# Altium PCB my_ROBOT.PcbDoc
Units mil, origin at the board's own origin, x right, y up, seen from the top; angles counter-clockwise.
Board outline 3790.92 x 4990.98 mil, 2 copper layers (Top Layer, Bottom Layer); 77 components, 81 nets, 300 pads, 118 vias.
Unrouted connection lines stored in the file: 2.
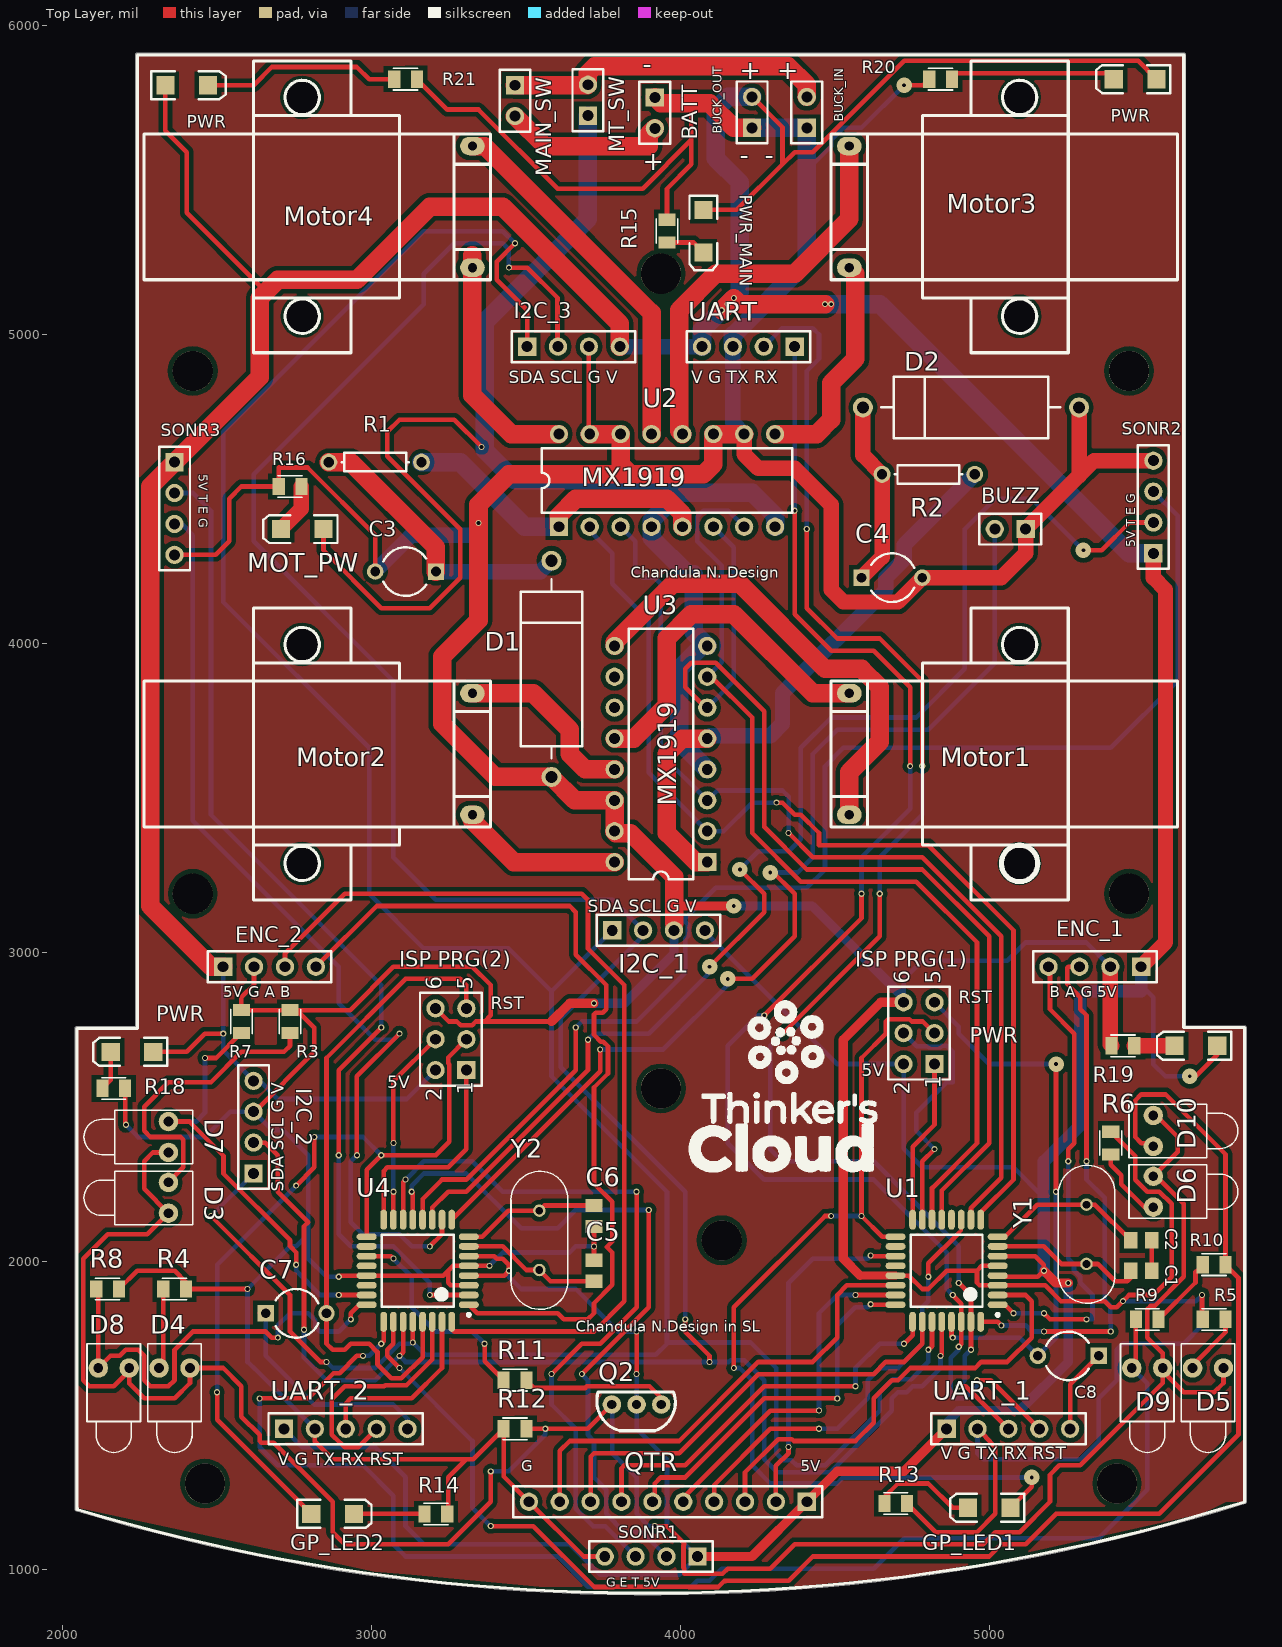
[diagram p0: Top Layer view]
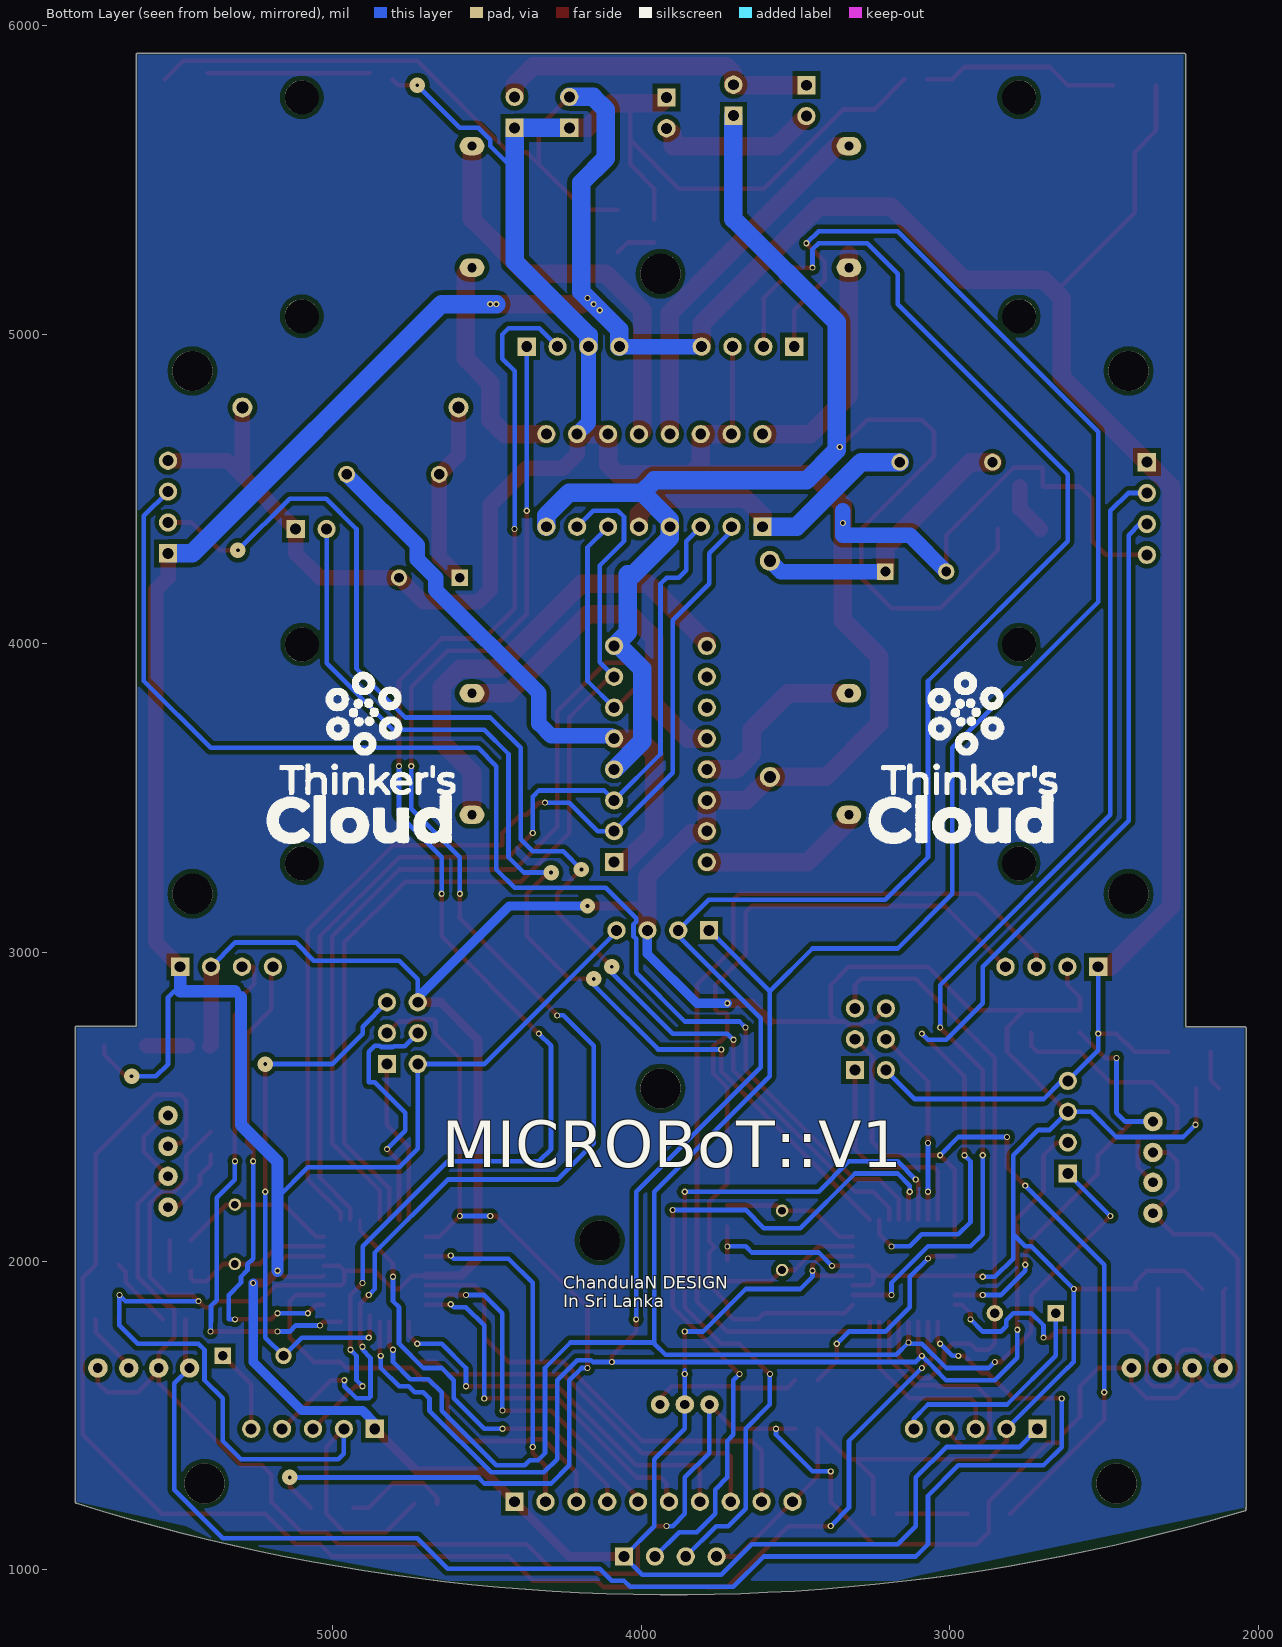
[diagram p1: Bottom Layer view, seen from below]

## Layer stack, top to bottom
Top Solder: solder mask 0.4, Solder Resist, Dk 3.5
Top Layer: signal copper 1.4
Dielectric 1: dielectric 12.6, FR-4, Dk 4.8
Bottom Layer: signal copper 1.4
Bottom Solder: solder mask 0.4, Solder Resist, Dk 3.5

## Board outline
2041.83,1199.19 cw(c2045.88,1202.15) 2040.87,1202.15 2040.87,2753.42 cw(c2045.88,2753.42) 2045.88,2758.43 2236.59,2758.43 2236.59,5905.51 cw(c2241.61,5905.51) 2241.61,5910.53 5629.92,5910.53 cw(c5629.92,5905.51) 5634.94,5905.51 5634.94,2760.92 5826.77,2760.92 cw(c5826.77,2755.91) 5831.79,2755.91 5831.79,1220.47 cw(c5826.77,1220.47) 5828.27,1215.69 cw(c3896.84,7363.24) 2044.43,1191.41 cw(c2045.87,1196.22)

## Design rules (kind name [scope] priority, off if disabled: settings)
Clearance [All] p1: gap=8 except(15: Track-Poly SMDPad-Poly THPad-Poly Via-Poly Poly-Poly)
PolygonConnect [All] p1: connectstyle=Relief reliefconductorwidth=10 reliefentries=4 polygonreliefangle="90 Angle" airgapwidth=10
RoutingVias [All] p1: holewidth=28 width=50 viastyle="Through Hole" minholewidth=28 minwidth=50 maxholewidth=28 maxwidth=50
SolderMaskExpansion [All] p1: expansion=4
Width [All] p1: maxlimit=80 minlimit=10 preferedwidth=15
30 further rules are at their usual default settings.

## Classes and differential pairs
component class MCU_2: C5 C6 C7 D3 D4 D5 D6 D7 D8 D9 D10 D12 P13 P14 P15 P16 P17 P18 P19 Q2 R3 R4 R5 R6 R7 R8 R9 R10 R11 R12 R14 U4 Y2
component class Motor_control: C3 C4 D1 D2 MOT_PW Motor1 Motor2 Motor3 Motor4 PWR R1 R2 R16 R18 R19 R20 R21 U2 U3
component class My_robot_1: BATT BUCK_IN BUCK_OUT C1 C2 C8 ENC_1 GP_LED1 I2C_1 I2C_2 I2C_3 MAIN_SW MT_SW PWR_MAIN QTR R13 R15 U1 UART UART_1 Y1

## Components (designator, comment, footprint, x,y, rotation, side; value= is the part's Value field where it differs from the comment)
BATT "Battery" HDR1X2 3917.32,5767.72 r270 top (schematic designator P20)
BUCK_IN "Buck_In" HDR1X2 4409.45,5669.29 r90 top (schematic designator P23)
BUCK_OUT "Buck_out" HDR1X2 4232.28,5669.29 r90 top (schematic designator P24)
BUZZ "Buzzer" HDR1X2 5118.11,4370.08 r180 top (schematic designator P19)
C1 "Cap_0805" CAP_0805 5492.13,1968.5 r0 top
C2 "Cap_0805" CAP_0805 5492.13,2066.93 r0 top
C3 "Cap2" CAPR5-4X5 3110.24,4232.28 r180 top
C4 "Cap2" CAPR5-4X5 4685.04,4212.6 r0 top
C5 "Cap_0805" CAP_0805 3720.47,1968.5 r90 top
C6 "Cap_0805" CAP_0805 3720.47,2145.67 r270 top
C7 "Cap2" CAPR5-4X5 2755.91,1830.71 r0 top
C8 "Cap2" CAPR5-4X5 5255.91,1692.91 r180 top
D1 "D Zener" DIODE-0.7 3582.68,3917.32 r90 top
D2 "D Zener" DIODE-0.7 4940.94,4763.78 r180 top
D3 "LED0" LED-1 2342.52,2204.72 r180 top
D4 "LED0" LED-1 2362.2,1653.54 r270 top
D5 "LED0" LED-1 5708.66,1653.54 r270 top
D6 "LED0" LED-1 5531.5,2224.41 r0 top
D7 "LED0" LED-1 2342.52,2401.57 r180 top
D8 "LED0" LED-1 2165.35,1653.54 r270 top
D9 "LED0" LED-1 5511.81,1653.54 r270 top
D10 "LED0" LED-1 5531.5,2421.26 r0 top
ENC_1 "Interrupt_1" HDR1X4 5492.13,2952.76 r180 top (schematic designator P12)
ENC_2 "Interrupt_2" HDR1X4 2519.68,2952.76 r0 top (schematic designator P13)
GP_LED1 "LED2" 3.2X1.6X1.1 5000,1200.79 r180 top (schematic designator D11)
GP_LED2 "LED2" 3.2X1.6X1.1 2874.02,1181.1 r0 top (schematic designator D12)
I2C_1 "DISPLAY" HDR1X4 3779.53,3070.87 r0 top (schematic designator P8)
I2C_2 "I2C_2" HDR1X4 2618.11,2283.46 r90 top (schematic designator P7)
I2C_3 "I2C_1" HDR1X4 3503.94,4960.63 r0 top (schematic designator P9)
"ISP PRG(1)" "ISP_Prgm" HDR2X3 4822.83,2637.8 r90 top (schematic designator P11)
"ISP PRG(2)" "ISP_Prgm2" HDR2X3 3307.09,2618.11 r90 top (schematic designator P15)
MAIN_SW "Main_SW" HDR1X2 3464.57,5807.09 r270 top (schematic designator P21)
MOT_PW "MOTOR" 3.2X1.6X1.1 2775.59,4370.08 r180 top (schematic designator D14)
Motor1 "MotorRF" Micro_Metal_Motor 5610.24,3405.51 r180 top (schematic designator P3)
Motor2 "MotorRR" Micro_Metal_Motor 2263.78,3877.95 r0 top (schematic designator P5)
Motor3 "MotorLF" Micro_Metal_Motor 5610.24,5177.17 r180 top (schematic designator P2)
Motor4 "MotorLR" Micro_Metal_Motor 2263.78,5649.61 r0 top (schematic designator P4)
MT_SW "Motor_Sw" HDR1X2 3700.79,5708.66 r90 top (schematic designator P22)
PWR "PWR" 3.2X1.6X1.1 2224.41,2677.17 r180 top (schematic designator D15)
PWR "PWR" 3.2X1.6X1.1 5669.29,2696.85 r180 top (schematic designator D16)
PWR "PWR" 3.2X1.6X1.1 5472.44,5826.77 r180 top (schematic designator D17)
PWR "PWR" 3.2X1.6X1.1 2401.57,5807.09 r0 top (schematic designator D18)
PWR_MAIN "PWR" 3.2X1.6X1.1 4074.8,5334.65 r270 top (schematic designator D13)
Q2 "NPN" NPN-d400 3858.27,1535.43 r90 top
QTR "QTR" HDR1X10 4409.45,1220.47 r180 top (schematic designator P1)
R1 "Res1" AXIAL-0.3 3011.81,4586.61 r0 top
R2 "Res1" AXIAL-0.3 4803.15,4547.24 r0 top
R3 "Res_0805" Res_0805 2736.22,2775.59 r270 top
R4 "Res_0805" Res_0805 2362.2,1909.45 r180 top
R5 "Res_0805" Res_0805 5728.35,1811.02 r0 top
R6 "Res_0805" Res_0805 5393.7,2381.89 r270 top
R7 "Res_0805" Res_0805 2578.74,2775.59 r270 top
R8 "Res_0805" Res_0805 2145.67,1909.45 r180 top
R9 "Res_0805" Res_0805 5511.81,1811.02 r180 top
R10 "Res_0805" Res_0805 5728.35,1988.19 r0 top
R11 "Res_0805" Res_0805 3464.57,1614.17 r0 top
R12 "Res_0805" Res_0805 3464.57,1456.69 r180 top
R13 "Res_0805" Res_0805 4697.6,1214.61 r0 top
R14 "Res_0805" Res_0805 3208.66,1181.1 r0 top
R15 "Res_0805" Res_0805 3956.69,5334.65 r270 top
R16 "Res_0805" Res_0805 2736.22,4507.87 r0 top
R18 "Res_0805" Res_0805 2165.35,2559.06 r180 top
R19 "Res_0805" Res_0805 5433.07,2696.85 r0 top
R20 "Res_0805" Res_0805 4842.52,5826.77 r0 top
R21 "Res_0805" Res_0805 3110.24,5826.77 r180 top
SONR1 "SONAR3" HDR1X4 4055.12,1043.31 r180 top (schematic designator P18)
SONR2 "SONAR2" HDR1X4 5531.5,4291.34 r90 top (schematic designator P17)
SONR3 "SONAR1" HDR1X4 2362.2,4586.61 r270 top (schematic designator P16)
U1 "ATmega328P-AU" 32A_N 4862.2,1968.5 r180 top
U2 "LM246N_1" DIP16 3956.69,4527.56 r0 top
U3 "LM246N_2" DIP16 3937.01,3641.73 r90 top
U4 "ATmega328P-AU" 32A_N 3149.61,1968.5 r180 top
UART "UART" HDR1X4 4370.08,4960.63 r180 top (schematic designator P6)
UART_1 "FTDI_Prgm" HDR1X5 4862.2,1456.69 r0 top (schematic designator P10)
UART_2 "FTDI_Prgm2" HDR1X5 2716.54,1456.69 r0 top (schematic designator P14)
Y1 "16MHz" XTAL_THT 5314.96,2086.61 r90 top
Y2 "16MHz" XTAL_THT 3543.31,2066.93 r90 top

## Footprints (in the part's own frame and the unit in brackets; to place one, negate y for a bottom-side part, rotate by r counter-clockwise, add the part's x,y. Pads: shape width x height; smd on the part's side, far side on the other; paste and mask are expansions set on the pad)
3.2X1.6X1.1 [mm] "SMT LED; 2 Flat Leads"
  rect 1.5x1.5 smd: 1(-1.75,0) 2(1.75,0)
  silkscreen extent -2.9,-1.15 3.2,1.15
32A_N [mm] "Thin QFP, 32-Leads, Body 7x7mm, Pitch 0.8mm, IPC Medium Density"
  oval 1.65x0.55 smd: 1(-4.2,2.8) 2(-4.2,2) 3(-4.2,1.2) 4(-4.2,0.4) 5(-4.2,-0.4) 6(-4.2,-1.2) 7(-4.2,-2) 8(-4.2,-2.8) 17(4.2,-2.8) 18(4.2,-2) 19(4.2,-1.2) 20(4.2,-0.4) 21(4.2,0.4) 22(4.2,1.2) 23(4.2,2) 24(4.2,2.8)
  oval 0.55x1.65 smd: 9(-2.8,-4.2) 10(-2,-4.2) 11(-1.2,-4.2) 12(-0.4,-4.2) 13(0.4,-4.2) 14(1.2,-4.2) 15(2,-4.2) 16(2.8,-4.2) 25(2.8,4.2) 26(2,4.2) 27(1.2,4.2) 28(0.4,4.2) 29(-0.4,4.2) 30(-1.2,4.2) 31(-2,4.2) 32(-2.8,4.2)
  silkscreen extent -4.33,-2.95 2.95,3.75, body extent -3.5,-3.5 3.5,3.5, height 1.2
AXIAL-0.3 [mm] "Axial Device, Thru-Hole; 2 Leads; 0.3 in Pin Spacing"
  round 1.4 hole 0.85: 1(-3.81,0) 2(3.81,0)
  silkscreen extent -2.77,-0.76 2.77,0.76
CAP_0805 [mm]
  rect 1.1x1.38 smd: 1(-0.863,0) 2(0.863,0)
  body extent -1,-0.66 1,0.65, height 0.79
CAPR5-4X5 [mm] "Capacitor; 2 Leads"
  rect 1.35x1.35 hole 0.8: 1(-2.5,0)
  round 1.35 hole 0.8: 2(2.5,0)
  silkscreen extent -1.69,-2 1.82,2
DIODE-0.7 [mm] "Diode, Thru-Hole; 2 Leads; 0.7 in Pin Spacing"
  round 1.65 hole 1: 1(-8.89,0) 2(8.89,0)
  silkscreen extent -7.37,-2.54 7.37,2.54
DIP16 [mm] "DIP; 16 Leads; Row Spacing 7.62 mm; Pitch 2.54 mm"
  rect 1.5x1.5 hole 0.9: 1(-8.89,-3.81)
  round 1.5 hole 0.9: 2(-6.35,-3.81) 3(-3.81,-3.81) 4(-1.27,-3.81) 5(1.27,-3.81) 6(3.81,-3.81) 7(6.35,-3.81) 8(8.89,-3.81) 9(8.89,3.81) 10(6.35,3.81) 11(3.81,3.81) 12(1.27,3.81) 13(-1.27,3.81) 14(-3.81,3.81) 15(-6.35,3.81) 16(-8.89,3.81)
  silkscreen extent -10.3,-2.65 10.3,2.65
HDR1X2 [mm] "Connector; Header; 2 Position"
  rect 1.5x1.5 hole 0.9: 1(0,0)
  round 1.5 hole 0.9: 2(2.54,0)
  silkscreen extent -1.27,-1.27 3.81,1.27
HDR1X4 [mm] "Connector; Header; 4 Position"
  rect 1.5x1.5 hole 0.9: 1(0,0)
  round 1.5 hole 0.9: 2(2.54,0) 3(5.08,0) 4(7.62,0)
  silkscreen extent -1.27,-1.27 8.89,1.27
HDR1X5 [mm] "Connector; Header; 5 Position"
  rect 1.5x1.5 hole 0.9: 1(0,0)
  round 1.5 hole 0.9: 2(2.54,0) 3(5.08,0) 4(7.62,0) 5(10.16,0)
  silkscreen extent -1.27,-1.27 11.43,1.27
HDR1X10 [mm] "Connector; Header; 10 Position"
  rect 1.5x1.5 hole 0.9: 1(0,0)
  round 1.5 hole 0.9: 2(2.54,0) 3(5.08,0) 4(7.62,0) 5(10.16,0) 6(12.7,0) 7(15.24,0) 8(17.78,0) 9(20.32,0) 10(22.86,0)
  silkscreen extent -1.27,-1.27 24.13,1.27
HDR2X3 [mm] "Connector; Header; 3x2 Position"
  rect 1.5x1.5 hole 0.9: 1(0,0)
  round 1.5 hole 0.9: 2(0,2.54) 3(2.54,0) 4(2.54,2.54) 5(5.08,0) 6(5.08,2.54)
  silkscreen extent -1.27,-1.27 6.35,3.81
LED-1 [mm] "LED; 2 Leads"
  round 1.6 hole 0.8: 1(0,1.27) 2(0,-1.27)
  silkscreen extent -2,-2.2 6.95,2.2
Micro_Metal_Motor [mil]
  oval 80x60 hole 30: 1(1062.99,-433.07) 2(1062.99,-39.37)
  silkscreen extent 0,-709 1122,236
NPN-d400 [mil]
  round 60 hole 30: 1(0,0) 2(0,-80) 3(0,80)
  silkscreen extent -85,-126 40,129
Res_0805 [mm]
  rect 1x1.42 smd: 1(-0.935,0) 2(0.935,0)
  silkscreen extent -1,-0.89 1,0.89, body extent -1,-0.63 1,0.63, height 0.54
XTAL_THT [mm]
  round 1.03 hole 0.63: 1(-2.44,0) 2(2.44,0)
  silkscreen extent -5.68,-2.33 5.68,2.33

## Part data
BATT BUCK_IN BUCK_OUT BUZZ MAIN_SW Motor1 Motor2 Motor3 Motor4 MT_SW: library part "Header 2", "Header, 2-Pin"
C1 C2 C5 C6: "Cap Ceramic 10uF 10V X5R 10% SMD 0805 85°C Embossed Plastic T/R"
C3 C4 C7 C8: "Capacitor"
D1 D2: "Zener Diode"
D3 D4 D5 D6 D7 D8 D9 D10: "Typical INFRARED GaAs LED"
ENC_1 ENC_2 I2C_1 I2C_2 I2C_3 SONR1 SONR2 SONR3 UART: library part "Header 4", "Header, 4-Pin"
GP_LED1 GP_LED2: "Typical RED, GREEN, YELLOW, AMBER GaAs LED"
"ISP PRG(1)" "ISP PRG(2)": library part "Header 3X2", "Header, 3-Pin, Dual row"
MOT_PW PWR PWR PWR PWR PWR_MAIN: library part LED2, "Typical RED, GREEN, YELLOW, AMBER GaAs LED"
Q2: library part Component_1, "NPN- d400"
QTR: library part "Header 10", "Header, 10-Pin"
R1 R2: "Resistor"
R3 R4 R5 R6 R7 R8 R9 R10 R11 R12 R13 R14 R15 R16 R18 R19 R20 R21: "Res Thick Film 0805 392 Ohm 1% 1/3W ±100ppm/°C Molded SMD SMD T/R"
U1 U4: "8-bit AVR Microcontroller, 32KB Flash, 1KB EEPROM, 2KB SRAM, 32-pin TQFP, Industrial Grade (-40°C to 85°C)"
U2 U3: library part LM246N, "Programmable Quad Bipolar Operational Amplifier"
UART_1 UART_2: library part "Header 5", "Header, 5-Pin"
Y1 Y2: library part Xtal_THT, "Crystal 3.93216MHz 17pF 2-Pin HC-49/U"

## Free pads (board coordinates)
  round 110 hole 110: 3(2775.59,5767.72) 5(5098.43,5059.06) 6(5098.43,5767.72) 7(5098.43,3996.06) 8(2775.59,5059.06) 9(5098.43,3287.4) 10(2775.59,3287.4) 12(2775.59,3996.06)
  round 130 hole 130: 13(2421.26,4881.89) 14(5452.76,4881.89) 15(2421.26,3188.98) 16(5452.76,3188.98) 17(2460.63,1279.53) 18(5413.39,1279.53) 19(3937.01,2559.06) 20(4133.86,2066.93) 21(3937.01,5196.85)

## Via types
v1: diameter 20, hole 12, Top Layer to Bottom Layer, 107 vias
v2: diameter 50, hole 12, Top Layer to Bottom Layer, 10 vias
v3: diameter 20, hole 12, Top Layer to Bottom Layer, tented bottom, 1 vias

## Nets (pads, with @x,y where several pads share a name; then routed paths per layer and width w, separated by ;. In a path a pad name is that pad's centre, name@x,y a point inside that pad or via, vN(x,y) a via of type N, cw(c..) or ccw(c..) an arc to the next point about the centre after c; other vN are vias at no path point)
GND: "ISP PRG(1).6" "ISP PRG(2).6" BATT.1 BUCK_IN.1 BUCK_OUT.1 BUZZ.1 C3.2 C4.2 C5.2 C6.2 D1.1 D2.1 ENC_1.2 ENC_2.2 I2C_1.3 I2C_2.3 I2C_3.3 QTR.10 R3.1 R4.1 R5.1 R6.1 R7.1 R8.1 R12.2 R13.2 R14.2 R15.1 R16.1 R18.1 R19.1 R20.1 R21.1 SONR1.4 SONR2.4 SONR3.4 U1.3 U1.5 U1.21 U2.10 U2.11 U2.14 U2.15 U3.10 U3.11 U3.14 U3.15 U4.3 U4.5 U4.21 UART.3 UART_1.2 UART_2.2 | length 25905.2
  Top Layer w10: 3399.61,2775.59 3457.87,2775.59
  Top Layer w15: R8.1 2241.54,1968.5 2362.2,1968.5 2399.02,1931.69 R4.1 v1(2598.43,1909.45) ; v1@2202.17,2443.5 R18.1 ; SONR3.4 2495.28,4286.61 2539.37,4330.71 2539.37,4468.5 2578.74,4507.87 R16.1 2699.41,4569.49 2792.72,4569.49 3011.81,4350.39 C3.2 ; I2C_2.3 2621.26,2483.47 2814.96,2677.17 2814.96,2755.91 R3.1@2758.46,2812.4 ; ENC_2.2 2619.68,2895.27 2578.74,2854.33 R7.1 R3.1 R3.1@2758.46,2812.4 ; UART_2.2 2816.54,1415.75 2874.02,1358.27 3307.09,1358.27 ; v3(2893.7,1948.82) 2897.64,1952.75 U4.21 3232.28,1952.75 3248.03,1968.5 ; R21.1 3245.47,5728.35 3346.46,5728.35 3602.36,5472.44 3877.95,5472.44 4035.43,5629.92 4035.43,5748.03 4035.43,5551.18 3956.69,5472.44 R15.1 ; 3207.09,2818.11 3249.61,2775.59 3275.98,2775.59 3288.43,2763.14 3325.74,2763.14 3338.19,2775.59 3582.68,2775.59 ; R14.2 3248.03,1181.1 3248.03,1299.21 3307.09,1358.27 ; U4.3 3255.91,1921.26 3248.03,1929.13 3248.03,1968.5 ; 3366.14,2775.59 3385.83,2795.28 3385.83,2893.7 3326.77,2952.76 3070.87,2952.76 2930.51,2812.4 R3.1@2758.46,2812.4 ; v1(3381.89,1984.25) U4.5 3263.78,1984.25 3248.03,1968.5 ; I2C_3.3 3703.94,4680.31 U2.15 ; C5.2 C6.2 ; SONR1.4 3686.61,1043.31 QTR.10 3427.76,1302.16 R12.2 3329.33,1358.27 3307.09,1358.27 ; I2C_1.3 3979.53,3133.07 ; U1.21 4740.16,1952.75 4783.46,1909.45 4803.15,1909.45 4862.2,1968.5 4960.63,1968.5 ; v2(4724.41,5807.09) 4786.02,5807.09 R20.1 ; R13.2 4826.97,1122.05 4960.63,1122.05 5019.69,1181.1 5019.69,1397.64 4988.28,1429.04 4988.28,1430.61 UART_1.2 ; U1.5 4976.38,1984.25 4960.63,1968.5 ; R6.1 5472.44,2339.96 5472.44,2263.78 5511.81,2224.41 5551.18,2224.41 5590.55,2185.04 5590.55,1948.82 5531.5,1889.76 5452.76,1889.76 v1(5433.07,1870.08) 5413.39,1850.39 5393.7,1850.39 5374.02,1870.08 5232.46,1870.08 5181.28,1921.26 U1.3 4968.51,1921.26 4960.63,1929.13 4960.63,1968.5 ; v1(5688.98,1889.76) 5688.98,1813.58 R5.1
  Top Layer w25: 4582.68,1952.75 U1.21
  Top Layer w30: 3582.68,2775.59 3641.73,2834.65 v1(3720.47,2834.65) ; 3979.53,3133.07 3996.06,3149.61 v2(4173.23,3149.61) ; 4582.68,1952.75 4527.56,2007.87 4527.56,2716.54 4648.82,2837.8 4722.83,2837.8
  Top Layer w50: U2.10 4206.69,4612.21 4251.97,4566.93 4370.08,4566.93 4488.19,4448.82 4488.19,4173.68 4528.01,4133.86 4704.72,4133.86 C4.2 5039.37,4212.6 5118.11,4291.34 BUZZ.1 5290.94,4542.91 ; D2.1 5290.94,4542.91 ; ENC_1.2 5392.13,2700.98 R19.1 ; SONR2.4 5339.37,4591.34 5290.94,4542.91
  Top Layer w60: U2.15 U2.14 3806.69,4579.13 3838.58,4547.24 ; BATT.1 3937.01,5748.03 4035.43,5748.03 4094.49,5748.03 4173.23,5669.29 BUCK_OUT.1 ; I2C_1.3@3979.53,3093.7 3979.53,3244.88 3838.58,3385.83 3791.34,3385.83 3785.43,3391.73 U3.15 U3.14 3658.27,3491.73 D1.1 3401.18,3567.32 3228.35,3740.16 3228.35,3956.69 3346.46,4074.8 3346.46,4448.82 3444.88,4547.24 3838.58,4547.24 ; U2.10 U2.11 4106.69,4579.13 4074.8,4547.24 3838.58,4547.24
  Bottom Layer w15: v1(2204.72,2440.94) 2244.09,2401.57 2460.63,2401.57 2542.52,2483.47 I2C_2.3 2677.17,2424.41 2713.39,2424.41 2795.28,2342.52 2795.28,2086.61 ; UART_2.2 2618.11,1655.12 2618.11,1653.54 2598.43,1673.23 v1(2598.43,1909.45) 2736.22,2047.24 2755.91,2047.24 2795.28,2086.61 ; v3(2893.7,1948.82) 2854.33,1948.82 2795.28,2007.87 2795.28,2086.61 ; v1(3381.89,1984.25) 3425.2,2027.56 3641.73,2027.56 3661.42,2047.24 v1(3720.47,2047.24) ; 4409.45,5531.5 4488.19,5610.24 4488.19,5629.92 4527.56,5669.29 4586.61,5669.29 v2(4724.41,5807.09) ; 4722.83,2837.8 4722.83,2853.38 4722.83,2911.81 4783.46,2972.44 5059.06,2972.44 5118.11,3031.5 5313.39,3031.5 ENC_1.2 ; UART_1.2 4962.2,1376.38 4980.31,1358.27 5295.28,1358.27 5354.33,1417.32 5354.33,1555.12 5413.39,1614.17 5413.39,1712.6 5433.07,1732.28 5629.92,1732.28 5688.98,1791.34 v1(5688.98,1889.76) 5669.29,1870.08 v1(5433.07,1870.08)
  Bottom Layer w30: v1(3720.47,2834.65) 3818.9,2834.65 3979.53,2995.28 I2C_1.3 ; v2(4173.23,3149.61) 4426.61,3149.61 4722.83,2853.38
  Bottom Layer w50: C3.2 3129.92,4350.39 3346.46,4350.39 3346.46,4429.13 ; UART.3 4170.08,4714.17 U2.10
  Bottom Layer w60: UART.3 4170.08,4996.85 4409.45,5236.22 4409.45,5531.5 BUCK_IN.1 BUCK_OUT.1
  other v1: 3346.46,4389.76
NetC1_1: C1.1 U1.7 Y1.1 | length 504.9
  Top Layer w15: U1.7 5177.16,2047.24 5233.86,1990.55 Y1.1 5351.97,1990.55 5407.99,1934.53 5447.36,1934.53 5458.15,1945.32 C1.1
NetC1_2: C1.2 C2.2 | length 98.4
  Top Layer w15: C1.2 C2.2
NetC2_1: C2.1 U1.8 Y1.2 | length 521.6
  Top Layer w15: U1.8 5051.18,2078.74 5155.12,2182.68 Y1.2 5342.4,2182.68 C2.1
NetC3_1: C3.1 D1.2 R1.1 | length 928.3
  Top Layer w60: R1.1 2933.07,4586.61 3208.66,4311.02 C3.1
  Bottom Layer w50: C3.1 3547.64,4232.28 D1.2
NetC4_1: C4.1 D2.2 R2.1 | length 604.5
  Top Layer w50: C4.1 4653.15,4279.13 R2.1 4590.94,4609.45 D2.2
NetC5_1: C5.1 U4.7 Y2.1 | length 452.2
  Top Layer w15: U4.7 3425.2,2047.24 3501.58,1970.87 Y2.1 3579.65,1934.53 C5.1
NetC6_1: C6.1 U4.8 Y2.2 | length 447.3
  Top Layer w15: U4.8 3358.27,2078.74 3442.52,2162.99 Y2.2 3559.96,2179.65 C6.1
NetC7_1: C7.1 UART_2.5 | length 733.8
  Top Layer w15: C7.1@2637.79,1830.71 C7.1
  Bottom Layer w15: C7.1 2657.48,1692.91 2814.96,1535.43 3070.87,1535.43 3116.54,1489.76 UART_2.5
NetC7_2: "ISP PRG(2).5" C7.2 U4.29 | length 2106.9
  Top Layer w15: U4.29 3165.35,1688.98 3096.87,1620.49 3064.55,1620.49 3019.19,1665.85 3019.19,1705.22 2992.13,1732.28 2933.07,1732.28 2913.39,1712.6 2874.02,1712.6 2854.33,1732.28 2854.33,1771.65 C7.2 2854.33,2657.48 3110.24,2913.39 3287.4,2913.39 3307.09,2893.7 3307.09,2818.11
NetC8_1: C8.1 UART_1.5 | length 274.4
  Top Layer w15: UART_1.5 5262.2,1600.79 C8.1
NetC8_2: "ISP PRG(1).5" C8.2 U1.29 | length 1826.2
  Top Layer w15: v1@4877.95,1755.9 U1.29 U1.29@4877.95,1822.83 ; v1(5216.54,2224.41) v2(5216.54,2637.8)
  Bottom Layer w15: 4822.83,2837.8 4901.57,2759.06 4901.57,2736.22 5000,2637.8 v2(5216.54,2637.8) ; v1(4881.89,1751.97) 5098.43,1751.97 C8.2 5216.54,1751.97 v1(5216.54,2224.41)
NetD3_1: D3.1 D4.1 D5.1 D6.1 D7.1 D8.1 D9.1 D10.1 Q2.3 R12.1 | length 7467.7
  Top Layer w15: D8.1 D8.1@2215.35,1644.49 ; D7.1 2292.52,2351.57 2263.78,2322.83 2263.78,2233.46 D3.1 2274.41,2086.61 2145.67,2086.61 2066.93,2007.87 2066.93,1614.17 2086.61,1594.49 2165.35,1594.49 D8.1@2215.35,1644.49 ; v1(3385.83,1318.9) 3385.83,1220.47 3248.03,1082.68 2913.39,1082.68 2874.02,1122.05 2874.02,1220.47 2682.82,1411.66 2643.45,1411.66 2637.8,1417.32 2637.8,1437.01 2578.74,1496.06 2578.74,1594.49 2519.68,1653.54 D4.1 2412.2,1605.12 2362.2,1555.12 2263.78,1555.12 2215.35,1603.54 D8.1@2215.35,1644.49 ; R12.1 3699.53,1456.69 Q2.3 ; v1(3917.32,1141.73) 3956.69,1141.73 4013.09,1085.33 4013.09,1082.26 4010.09,1079.26 4010.09,1007.36 4013.09,1004.36 4013.09,986.91 4136.52,986.91 4153.54,1003.94 4291.34,1003.94 4370.08,1082.68 4980.31,1082.68 5019.69,1122.05 5098.43,1122.05 5196.85,1220.47 5196.85,1308.27 5227.16,1338.58 5295.28,1338.58 5561.81,1605.12 D9.1@5561.81,1642.91 ; D10.1 5540.55,2471.26 5610.24,2401.57 5610.24,2353.15 D6.1 5540.55,2274.41 5629.92,2185.04 5629.92,1948.82 5535.58,1854.48 5522.52,1854.48 5511.81,1843.77 5511.81,1751.97 5561.81,1701.97 D9.1 D9.1@5561.81,1642.91 ; D5.1 5758.66,1605.12 5728.35,1574.8 5629.92,1574.8 D9.1@5561.81,1642.91
  Bottom Layer w15: v1(3385.83,1318.9) 3444.88,1318.9 3562.99,1437.01 v1(3562.99,1456.69) ; Q2.3 3779.53,1534.17 3779.53,1377.95 3858.27,1299.21 3858.27,1181.1 3897.64,1141.73 v1(3917.32,1141.73)
NetD3_2: D3.2 R3.2 | length 971.6
  Top Layer w15: D3.2 2390.94,2303.15 2390.94,2392.52 2381.89,2401.57 2283.46,2401.57 2263.78,2421.26 2263.78,2500 2342.52,2578.74 2480.32,2578.74 2578.74,2677.17 2716.54,2677.17 2736.22,2696.85 R3.2
NetD4_2: D4.2 R4.2 | length 261.4
  Top Layer w15: D4.2 2325.39,1666.73 R4.2
NetD5_2: D5.2 R5.2 | length 201.6
  Top Layer w15: D5.2 5658.66,1662.6 5765.16,1769.09 R5.2
NetD6_2: D6.2 R6.2 | length 244.6
  Top Layer w15: R6.2 5393.7,2312.21 5428.15,2277.76 5428.15,2249.02 5502.76,2174.41 D6.2
NetD7_2: D7.2 R7.2 U4.23 | length 1414.1
  Top Layer w15: D7.2 2410.63,2451.57 2520.77,2341.44 2520.77,2282.38 2736.22,2066.93 2736.22,2047.24 2755.91,2027.56 v1(2755.91,1988.19) ; v1(2460.63,2657.48) 2497.44,2657.48 R7.2 ; v1(2893.7,1889.76) U4.23
  Bottom Layer w15: D7.2 2431.89,2451.57 2460.63,2480.32 v1(2460.63,2657.48) ; v1(2755.91,1988.19) 2755.91,1968.5 2834.65,1889.76 v1(2893.7,1889.76)
NetD8_2: D8.2 R8.2 U4.24 | length 1525.3
  Top Layer w15: R8.2 2115.35,1902.95 D8.2 2154.72,1692.91 2185.04,1692.91 2204.72,1712.6 2244.09,1712.6 2263.78,1692.91 2263.78,1614.17 2283.46,1594.49 2342.52,1594.49 2362.2,1614.17 2362.2,1712.6 2421.26,1771.65 2657.48,1771.65 2677.17,1751.97 v1(2696.85,1751.97) ; v1(2933.07,1811.02) 2933.07,1830.71 2960.63,1858.27 U4.24
  Bottom Layer w15: v1(2696.85,1751.97) 2696.85,1791.34 2736.22,1830.71 2795.28,1830.71 2817.78,1808.21 2817.78,1788.52 2834.65,1771.65 2893.7,1771.65 v1(2933.07,1811.02)
NetD9_2: D9.2 R9.2 U4.25 | length 4560.3
  Top Layer w15: v1(2637.8,1555.12) 2795.28,1555.12 2876.83,1636.67 2896.52,1636.67 2952.76,1692.91 v1(2972.44,1692.91) ; v1(3031.5,1732.28) 3039.37,1740.16 U4.25 ; D9.2 5475,1666.73 R9.2
  Bottom Layer w15: v1(2637.8,1555.12) 2637.8,1397.64 2696.85,1338.58 2972.44,1338.58 3070.87,1240.16 3070.87,1082.68 3110.24,1043.31 3602.36,1043.31 3700.79,944.88 4035.43,944.88 4055.12,964.57 4094.49,964.57 4133.86,1003.94 4625.98,1003.94 4724.41,1102.36 5354.33,1102.36 5511.81,1259.84 5511.81,1603.54 D9.2 ; v1(2972.44,1692.91) 2992.13,1692.91 v1(3031.5,1732.28)
NetD10_2: D10.2 R10.2 U4.26 | length 5011.4
  Top Layer w15: U4.26 3070.87,1732.28 3051.18,1712.6 3051.18,1692.91 v1@3090.24,1653.86 ; v1(3385.83,1141.73) 3523.62,1141.73 3720.79,944.57 3784.66,944.57 3784.98,944.88 4026.83,944.88 4027.15,944.57 4122.46,944.57 4141.8,963.91 4146.04,963.91 4146.7,964.57 4350.39,964.57 4429.13,1043.31 5000,1043.31 5039.37,1082.68 5118.11,1082.68 5216.54,1181.1 5551.18,1181.1 5807.09,1437.01 5807.09,1946.26 R10.2 5765.16,2345.08 5570.87,2539.37 5492.13,2539.37 5472.44,2519.68 5472.44,2401.57 5492.13,2381.89 5520.87,2381.89 D10.2
  Bottom Layer w15: v1(3090.55,1653.54) 3326.77,1417.32 3326.77,1200.79 v1(3385.83,1141.73)
NetD11_1: "ISP PRG(1).3" GP_LED1.1 U1.17 | length 3128
  Top Layer w15: v1(4173.23,1653.54) 4173.23,1850.39 4468.5,2145.67 v1(4488.19,2145.67) ; U1.17 4653.54,2078.74 v1(4586.61,2145.67) 4586.61,2657.48 4665.35,2736.22 4665.35,2775.59 4672.59,2782.82 4741.48,2782.82 4748.72,2775.59 4785.04,2775.59 4822.83,2737.8 ; GP_LED1.1 5137.8,1269.69 v2(5137.8,1299.21)
  Bottom Layer w15: v1(4173.23,1653.54) 4192.6,1653.54 4232.28,1613.86 4232.28,1338.58 4291.34,1279.53 4507.87,1279.53 4527.56,1299.21 v2(5137.8,1299.21) ; v1(4488.19,2145.67) v1(4586.61,2145.67)
NetD11_2: GP_LED1.2 R13.1 | length 342.1
  Top Layer w15: R13.1 4660.79,1235.59 4704.72,1279.53 4803.15,1279.53 4881.89,1200.79 GP_LED1.2
NetD12_1: "ISP PRG(2).3" GP_LED2.1 U4.17 | length 2598.6
  Top Layer w15: v1(2500,1574.8) 2500,1486.22 GP_LED2.1 ; v1(2755.91,2244.09) 2814.96,2303.15 v1(2814.96,2401.57) ; U4.17 2984.25,2295.28 v1(3031.5,2342.52) 3208.66,2342.52 3252.11,2385.97 3252.11,2636.76 3248.03,2640.84 3248.03,2659.06 3307.09,2718.11
  Bottom Layer w15: v1(2500,1574.8) 2500,1988.19 v1(2755.91,2244.09) ; v1(2814.96,2401.57) 2972.44,2401.57 v1(3031.5,2342.52)
NetD12_2: GP_LED2.2 R14.1 | length 228.9
  Top Layer w15: GP_LED2.2 R14.1
NetD13_1: "ISP PRG(1).2" "ISP PRG(2).2" BUCK_OUT.2 ENC_1.1 ENC_2.1 I2C_1.4 I2C_2.4 I2C_3.4 PWR.1 PWR_MAIN.1 Q2.1 QTR.1 SONR1.1 SONR2.1 SONR3.1 U1.4 U1.6 U4.4 U4.6 UART.4 UART_1.1 UART_2.1 | length 21242.1
  Top Layer w15: PWR.1@2293.31,2677.17 2401.57,2677.17 2460.63,2736.22 v1(2519.68,2736.22) ; PWR.1@2332.68,5807.09 2332.68,5659.45 2401.57,5590.55 2401.57,5393.7 2657.48,5137.8 ; U4.4 3429.13,1952.75 v1(3444.88,1968.5) 3444.88,1988.19 3425.2,2007.87 3405.51,2007.87 3397.64,2015.75 U4.6 ; v1(3858.27,1633.86) v1(3858.27,1771.65) ; PWR_MAIN.1 4183.07,5403.54 4330.71,5551.18 ; BUCK_OUT.2 4330.71,5670.87 4330.71,5551.18 ; U1.4 5031.5,1948.82 5157.48,1948.82 v1(5177.17,1968.5) 5177.17,1988.19 5149.61,2015.75 U1.6 ; PWR.1@5541.34,5826.77 5482.28,5885.83 4724.41,5885.83 4429.13,5590.55 4370.08,5590.55 4330.71,5551.18 ; v2(5649.61,2598.43) 5669.29,2598.43 5738.19,2667.32 PWR.1@5738.19,2696.85
  Top Layer w30: SONR1.1 4232.28,1043.31 QTR.1 4507.87,1318.9 4724.41,1318.9 UART_1.1@4853.94,1448.42 ; v1(5177.17,1968.5) 5216.54,1929.13 v1(5255.91,1929.13)
  Top Layer w50: ENC_1.1 5570.87,3031.5 5570.87,4173.23 5531.5,4212.6 SONR2.1
  Top Layer w60: ENC_2.1 2480.31,2952.76 2283.46,3149.61 2283.46,4507.87 SONR3.1 2637.8,4862.2 2637.8,5118.11 2696.85,5177.17 2952.76,5177.17 3188.98,5413.39 3425.2,5413.39 3803.94,5034.65 I2C_3.4 ; v1(4133.86,5078.74) v1(4173.23,5118.11) 4192.91,5098.43 v1(4468.5,5098.43)
  Bottom Layer w15: ENC_2.1 2519.68,2681.89 I2C_2.4 2637.8,2583.47 2696.85,2524.41 3113.39,2524.41 3207.09,2618.11 ; UART_2.1 2775.59,1397.64 3011.81,1397.64 3110.24,1299.21 3110.24,1141.73 3169.29,1082.68 3641.73,1082.68 3740.16,984.25 3996.06,984.25 SONR1.1 3956.69,1141.73 3956.69,1358.27 3858.27,1456.69 Q2.1 3858.27,1646.9 v1(3858.27,1633.86) ; v1(3444.88,1968.5) 3444.88,1948.82 3484.25,1909.45 3661.42,1909.45 3799.21,1771.65 v1(3858.27,1771.65) ; I2C_1.4 4079.53,3066.14 4507.87,2637.8 4722.83,2637.8 4722.83,2363.78 4783.46,2303.15 5078.74,2303.15 5177.17,2204.72 ; 5295.28,2854.33 5314.96,2874.02 ; 5492.13,2874.02 5511.81,2874.02 5531.5,2854.33 5531.5,2637.8 5570.87,2598.43 v2(5649.61,2598.43)
  Bottom Layer w30: UART_1.1 4862.2,1476.38 4901.57,1515.75 5098.43,1515.75 5255.91,1673.23 v1(5255.91,1929.13)
  Bottom Layer w40: v1(5177.17,1968.5) 5177.17,2204.72 5177.17,2322.83 5295.28,2440.94 5295.28,2854.33 ; 5314.96,2874.02 5492.13,2874.02 ENC_1.1
  Bottom Layer w50: I2C_3.4 UART.4
  Bottom Layer w60: UART.4 4070.08,5014.96 4192.91,5137.8 4192.91,5492.13 4114.17,5570.87 4114.17,5728.35 4155.12,5769.29 BUCK_OUT.2 ; v1(4468.5,5098.43) 4645.67,5098.43 5452.76,4291.34 SONR2.1
  other v1: 4153.54,5098.43 4488.19,5098.43
NetD13_2: PWR_MAIN.2 R15.2 | length 131.4
  Top Layer w15: R15.2 4042.72,5297.83 PWR_MAIN.2
NetD14_1: MOT_PW.1 MT_SW.1 U2.4 U2.8 U3.4 U3.8 | length 4949.1
  Top Layer w15: MOT_PW.1 2844.49,4301.18 3031.5,4114.17 3188.98,4114.17 3287.4,4212.6 3287.4,4370.08 3051.18,4606.3 3051.18,4685.04 3090.55,4724.41 3267.72,4724.41 v1(3356.3,4635.83)
  Bottom Layer w60: MT_SW.1 3700.79,5374.01 3366.14,5039.37 3366.14,4625.98 3464.57,4527.56 3956.69,4527.56 3996.06,4488.19 ; U3.4 3996.06,3682.68 3996.06,3917.32 4070.47,3991.73 U3.8 4043.31,4035.43 4043.31,4224.41 4023.62,4224.41 3906.69,4341.34 U2.4 3906.69,4398.82 3996.06,4488.19 ; U2.8 4306.69,4413.78 4232.28,4488.19 3996.06,4488.19
NetD14_2: MOT_PW.2 R16.2 | length 165.3
  Top Layer w50: MOT_PW.2 2773.03,4436.42 R16.2
NetD15_2: PWR.2@2155.51,2677.17 R18.2 | length 129.3
  Top Layer w15: R18.2 2155.51,2586.02 PWR.2@2155.51,2677.17
NetD16_2: PWR.2@5600.39,2696.85 R19.2 | length 130.5
  Top Layer w50: R19.2 PWR.2@5600.39,2696.85
NetD17_2: PWR.2@5403.54,5826.77 R20.2 | length 524.2
  Top Layer w15: R20.2@4879.33,5846.46 PWR.2@5403.54,5846.46
NetD18_2: PWR.2@2470.47,5807.09 R21.2 | length 643.7
  Top Layer w15: PWR.2@2470.47,5807.09 2618.11,5807.09 2677.17,5866.14 2952.76,5866.14 2992.13,5826.77 R21.2
NetP1_2: QTR.2 U1.19 | length 1106.8
  Top Layer w15: QTR.2 4309.45,1337.01 4350.39,1377.94 v1(4350.39,1397.63) ; v1@4618.11,2015.75 U1.19
  Bottom Layer w15: v1(4350.39,1397.63) 4350.39,1929.13 4429.13,2007.87 4606.3,2007.87 v1(4616.14,2017.72)
NetP1_3: QTR.3 U1.2 | length 1491.8
  Top Layer w15: QTR.3 4209.45,1315.75 4316.84,1423.13 4360.95,1423.13 4366.76,1417.32 4566.93,1417.32 4625.98,1476.38 4625.98,1555.12 4684.72,1613.86 4693.32,1613.86 4693.64,1614.17 4704.72,1614.17 4744.09,1653.54 4954.27,1653.54 4973.95,1673.23 5059.06,1673.23 5137.8,1751.97 5137.8,1870.08 5118.11,1889.76 U1.2
NetP1_4: QTR.4 U1.11 | length 1406.2
  Top Layer w10: 4901.57,2090.55 4909.45,2098.42 U1.11
  Top Layer w15: QTR.4 4109.45,1274.8 4291.34,1456.69 v1(4448.82,1456.69) ; v1(4803.15,1948.82) 4803.15,1992.12 4901.57,2090.55
  Bottom Layer w15: v1(4448.82,1456.69) 4507.87,1456.69 4606.3,1555.12 4606.3,1614.17 4645.67,1653.54 4704.72,1653.54 4783.46,1732.28 4783.46,1850.39 4803.15,1870.08 v1(4803.15,1948.82)
NetP1_5: QTR.5 U1.23 | length 1157
  Top Layer w15: QTR.5 4009.45,1233.86 4291.34,1515.75 v1(4448.82,1515.75) ; v1(4566.93,1889.76) U1.23
  Bottom Layer w15: v1(4448.82,1515.75) 4448.82,1830.71 4507.87,1889.76 v1(4566.93,1889.76)
NetP1_6: QTR.6 U1.24 | length 1222.7
  Top Layer w15: QTR.6 3917.32,1228.35 3917.32,1279.53 3937.01,1299.21 4015.75,1299.21 4271.65,1555.12 v1(4507.87,1555.12) ; v1@4614.17,1858.27 U1.24
  Bottom Layer w15: v1(4507.87,1555.12) 4507.87,1791.34 4566.93,1850.39 4606.3,1850.39 v1(4616.14,1860.24)
NetP1_7: QTR.7 U1.25 | length 1307.5
  Top Layer w15: QTR.7 3809.45,1329.13 3818.9,1338.58 4015.75,1338.58 4271.65,1594.49 v1(4566.93,1594.49) ; v1(4724.41,1732.28) 4751.97,1759.84 U1.25
  Bottom Layer w15: v1(4566.93,1594.49) 4566.93,1653.54 4645.67,1732.28 v1(4724.41,1732.28)
NetP1_8: QTR.8 U1.26 | length 1442.7
  Top Layer w15: QTR.8 3709.45,1366.93 3720.47,1377.95 3996.06,1377.95 4251.97,1633.86 4625.98,1633.86 4665.35,1673.23 4724.41,1673.23 4783.47,1732.28 U1.26
NetP1_9: QTR.9 U1.22 | length 1567.4
  Top Layer w15: QTR.9@3622.05,1220.47 QTR.9 3609.45,1385.04 3641.73,1417.32 3996.06,1417.32 4251.97,1673.23 4429.13,1673.23 4507.87,1751.97 4507.87,1889.76 4539.37,1921.26 U1.22
NetP2_1: Motor3.1 U2.12 | length 1315.3
  Top Layer w60: U2.12 3996.06,4688.19 3996.06,5078.74 4114.17,5196.85 4370.08,5196.85 4547.24,5374.02 Motor3.1
NetP2_2: Motor3.2 U2.9 | length 733.8
  Top Layer w60: U2.9 4441.34,4677.56 4488.19,4724.41 4488.19,4842.52 4566.93,4921.26 4566.93,5196.85 Motor3.2
NetP3_1: Motor1.1 U3.12 | length 1159.9
  Top Layer w60: U3.12 3849.21,3691.73 3956.69,3799.21 3956.69,4015.75 4035.43,4094.49 4173.23,4094.49 4429.13,3838.58 Motor1.1
NetP3_2: Motor1.2 U3.9 | length 1541.7
  Top Layer w60: U3.9 3787.01,4003.54 3976.38,4192.91 4192.91,4192.91 4468.5,3917.32 4586.61,3917.32 4645.67,3858.27 4645.67,3681.1 4547.24,3582.68 Motor1.2
NetP4_1: Motor4.1 U2.16 | length 784.7
  Top Layer w60: 3326.77,5255.91 3326.77,4803.15 3452.36,4677.56 U2.16
NetP4_2: Motor4.2 U2.13 | length 1196
  Top Layer w60: Motor4.2 3366.14,5610.24 3906.69,5069.69 U2.13
NetP5_1: Motor2.1 U3.16 | length 535.2
  Top Layer w60: Motor2.1 3326.77,3425.2 3460.24,3291.73 U3.16
NetP5_2: Motor2.2 U3.13 | length 608.6
  Top Layer w60: Motor2.2 3523.62,3838.58 3641.73,3720.47 3641.73,3641.73 3691.73,3591.73 U3.13
NetP6_1: U1.30 UART.1 UART_1.4 | length 4815.7
  Top Layer w15: v1(4271.65,2795.28) 4586.61,3110.24 v1(4586.61,3188.98) ; v1(4370.08,4429.13) 4370.08,4094.49 4488.19,3976.38 4625.98,3976.38 4744.09,3858.27 v1(4744.09,3602.36) ; v1(4881.89,1889.76) 4909.45,1862.2 U1.30 4909.45,1730.32 v1(4901.57,1722.44) ; v1(4960.62,1614.17) 5004.72,1614.17 UART_1.4
  Bottom Layer w15: v1(4271.65,2795.28) 4251.97,2795.28 4153.54,2696.85 4153.54,2381.89 4271.65,2263.78 4625.98,2263.78 4862.2,2027.56 4862.2,1909.45 v1(4881.89,1889.76) ; v1(4370.08,4429.13) UART.1 ; v1(4586.61,3188.98) 4586.61,3307.09 4744.09,3464.57 v1(4744.09,3602.36) ; v1(4901.57,1722.44) 4901.57,1712.6 4876.07,1687.1 4876.07,1560.93 4881.89,1555.12 4921.26,1555.12 4960.62,1594.48 v1(4960.62,1614.17)
NetP6_2: U1.31 UART.2 UART_1.3 | length 4748.7
  Top Layer w15: v1(4330.71,2736.22) 4645.67,3051.18 v1(4645.67,3188.98) ; v1(4409.45,4370.08) 4409.45,4114.17 4507.87,4015.75 4645.67,4015.75 4783.46,3877.95 v1(4783.46,3602.36) ; v1(4901.57,1594.49) 4924.41,1594.49 UART_1.3 ; v1(4901.57,1929.13) 4940.95,1889.76 U1.31 v1(4940.94,1712.6)
  Bottom Layer w15: UART.2 4329.13,5019.69 4429.13,5019.69 4448.82,5000 4448.82,4921.26 4409.45,4881.89 v1(4409.45,4370.08) ; v1(4330.71,2736.22) 4291.34,2696.85 4291.34,2362.2 4330.71,2322.83 4625.98,2322.83 4901.57,2047.24 v1(4901.57,1929.13) ; v1(4645.67,3188.98) 4645.67,3307.09 4783.46,3444.88 v1(4783.46,3602.36) ; v1(4901.57,1594.49) 4921.26,1614.17 4921.26,1692.91 v1(4940.94,1712.6)
NetP7_1: I2C_1.1 I2C_2.1 I2C_3.1 U1.27 U4.28 | length 9177
  Top Layer w15: v1(2480.32,2145.67) 2736.22,1889.76 2736.22,1771.65 2834.65,1673.23 v1(2854.33,1673.23) ; v1(3133.86,1736.22) U4.28 ; v1(3464.57,5295.28) 3405.51,5236.22 3405.51,5177.17 3503.94,5078.74 I2C_3.1 ; v1(4803.15,1712.6) 4814.96,1724.41 U1.27
  Bottom Layer w15: v1(2480.32,2145.67) I2C_2.1 ; v1(2854.33,1673.23) 2874.02,1653.54 3011.81,1653.54 3090.55,1732.28 3129.92,1732.28 v1(3133.86,1736.22) 3173.85,1696.23 3920.64,1696.23 3956.69,1732.28 ; v1(3464.57,5295.28) 3425.2,5334.65 3169.29,5334.65 2519.68,4685.04 2519.68,4133.86 2992.13,3661.42 2992.13,3188.98 3169.29,3011.81 3444.88,3011.81 3582.68,2874.02 ; I2C_1.1 3582.68,2874.02 ; v1(4803.15,1712.6) 4803.15,1673.23 4747.41,1617.49 4688.67,1617.49 4645.67,1574.49 4645.67,1515.75 4468.5,1338.58 4376.58,1338.58 4359.71,1355.45 4333.52,1355.45 4311.02,1377.95 4311.02,1653.54 4228.35,1736.22 3960.63,1736.22 3956.69,1732.28 ; 3582.68,2874.02 3582.68,2598.43 3956.69,2224.41 3956.69,1732.28
NetP7_2: I2C_1.2 I2C_2.2 I2C_3.2 U1.28 U4.27 | length 9322.6
  Top Layer w15: I2C_2.2 2655.9,2383.47 2696.85,2342.52 2696.85,2224.41 2795.28,2125.98 2781.41,2112.11 v1(2781.41,1777.47) ; v1(3090.55,1692.91) 3102.36,1704.72 U4.27 ; v1(3444.88,5216.54) 3503.94,5216.54 3602.36,5118.11 3602.36,4962.21 I2C_3.2 ; v1(4015.75,1811.02) 4015.75,1771.65 4094.49,1692.91 v1(4094.49,1673.23) ; v1(4842.52,1692.91) 4846.46,1696.85 U1.28
  Bottom Layer w15: v1(2781.41,1777.47) 2781.41,1687.1 2854.33,1614.17 3012.44,1614.17 3051.18,1652.91 3051.18,1653.54 v1(3090.55,1692.91) 3110.24,1673.23 4156.85,1673.23 4162.67,1679.04 4206.78,1679.04 4271.65,1614.17 4271.65,1358.27 4314.34,1315.58 4484.87,1315.58 4685.04,1515.75 4685.04,1555.12 4704.72,1574.8 4733.01,1574.8 4752.69,1594.49 4783.46,1594.49 4842.52,1653.54 v1(4842.52,1692.91) ; v1(3444.88,5216.54) 3444.88,5275.59 3425.2,5295.28 3267.72,5295.28 3169.29,5196.85 3169.29,5098.43 2618.11,4547.24 2618.11,4330.71 3070.87,3877.95 3070.87,3307.09 3208.66,3169.29 3781.1,3169.29 I2C_1.2 3879.53,3052.76 3612.2,2785.43 3612.2,2627.95 4015.75,2224.41 v1(4015.75,1811.02)
NetP11_1: "ISP PRG(1).1" U1.16 | length 533.3
  Top Layer w15: U1.16 4751.97,2370.08 4822.83,2440.94 4822.83,2637.8
NetP11_4: "ISP PRG(1).4" U1.15 | length 832.1
  Top Layer w15: U1.15 4783.47,2322.84 v1(4822.83,2362.2)
  Bottom Layer w15: 4722.83,2737.8 4764.86,2695.77 4801.18,2695.77 4804.18,2692.77 4841.48,2692.77 4845.57,2696.85 4862.2,2696.85 4881.89,2677.17 4881.89,2578.74 4862.2,2578.74 4763.78,2480.32 4763.78,2421.26 v1(4822.83,2362.2)
NetP12_3: ENC_1.3 U1.32 | length 1711.3
  Top Layer w15: U1.32 5027.56,1803.15 v1(5039.37,1791.34) ; v1(5177.17,1771.65) v1(5393.7,1771.65) ; ENC_1.3 5255.91,2952.76 5252.76,2949.61 5252.76,2896.85 5295.28,2854.33 5295.28,2814.96 5314.96,2795.28 v1(5314.96,2322.83)
  Bottom Layer w15: v1(5039.37,1791.34) 5118.11,1791.34 5137.8,1771.65 v1(5177.17,1771.65) ; v1(5314.96,2322.83) 5314.96,2263.78 5374.02,2204.72 5374.02,1873.02 5392.52,1854.52 5392.52,1803.36 5393.7,1802.18 v1(5393.7,1771.65)
NetP12_4: ENC_1.4 U1.1 | length 1543.7
  Top Layer w15: U1.1 5051.18,1858.27 v1(5078.74,1830.71) ; v1(5177.17,1830.71) 5196.85,1811.02 v1(5314.96,1811.02) ; ENC_1.4 5196.85,2948.03 5196.85,2814.96 5275.59,2736.22 5275.59,2381.89 5255.91,2362.2 v1(5255.91,2322.83)
  Bottom Layer w15: v1(5078.74,1830.71) v1(5177.17,1830.71) ; v1(5255.91,2322.83) 5255.91,2007.87 5274.41,1989.37 5274.41,1969.69 5295.28,1948.82 5295.28,1929.13 5334.65,1889.76 5334.65,1811.02 v1(5314.96,1811.02)
NetP13_3: ENC_2.3 U4.32 | length 3086.9
  Top Layer w15: ENC_2.3 2719.68,2995.27 2913.39,3188.98 3681.1,3188.98 3700.79,3169.29 3700.79,3011.81 3818.9,2893.7 3818.9,1870.08 3720.47,1771.65 3267.72,1771.65 3259.84,1779.53 U4.32
NetP13_4: ENC_2.4 U4.1 | length 2840.2
  Top Layer w15: ENC_2.4 3016.53,3149.61 3641.73,3149.61 3661.42,3129.92 3661.42,2992.13 3759.84,2893.7 3759.84,2814.96 3749.03,2804.15 3726.03,2804.15 3720.47,2798.58 3720.47,2732.91 3742.85,2710.54 3750.72,2710.54 3765.66,2695.6 3765.66,2607.15 3720.47,2561.96 3720.47,2250.38 3779.53,2191.33 3779.53,2063.29 3761.66,2045.42 3779.53,2027.56 3779.53,1922.84 3720.47,1863.79 3720.47,1830.71 3700.79,1811.02 3622.05,1811.02 3602.36,1830.71 3342.52,1830.71 U4.1
NetP14_3: U4.31 UART_2.3 | length 590.9
  Top Layer w15: UART_2.3 2916.54,1538.58 2933.07,1555.12 3129.92,1555.12 3228.35,1653.54 U4.31
NetP14_4: U4.30 UART_2.4 | length 801.4
  Top Layer w15: UART_2.4 2957.48,1397.64 2913.39,1397.64 2899.36,1411.66 2897.89,1411.66 2871.51,1438.04 2871.51,1552.61 2913.39,1594.49 3041.46,1594.49 3044.46,1597.49 3113.24,1597.49 3196.85,1681.1 U4.30
NetP15_1: "ISP PRG(2).1" U4.16 | length 710.5
  Top Layer w15: U4.16 3039.37,2291.34 3051.18,2303.15 3248.03,2303.15 3307.09,2362.2 3307.09,2618.11
NetP15_4: "ISP PRG(2).4" U4.15 | length 640.7
  Top Layer w15: U4.15 v1(3070.87,2224.41) ; v1(3070.87,2381.89) 3070.87,2581.89 3207.09,2718.11
  Bottom Layer w15: v1(3070.87,2224.41) v1(3070.87,2381.89)
NetP16_2: SONR3.2 U4.2 | length 3295.7
  Top Layer w15: v1(2893.7,2342.52) 2893.7,2618.11 v1(3031.5,2755.91) ; v1(3188.98,1889.76) U4.2
  Bottom Layer w15: SONR3.2 2422.83,4486.61 2480.32,4429.13 2480.32,3444.88 3031.5,2893.7 v1(3031.5,2755.91) ; v1(2893.7,2342.52) 2893.7,2086.61 2933.07,2047.24 3070.87,2047.24 3188.98,1929.13 v1(3188.98,1889.76)
NetP16_3: SONR3.3 U4.10 | length 3106.3
  Top Layer w15: v1(2952.76,2342.52) 2952.76,2598.43 v1(3090.55,2736.22) ; v1(3188.98,2047.24) 3228.35,2086.61 U4.10
  Bottom Layer w15: SONR3.3 2385.04,4386.61 2421.26,4350.39 2421.26,3425.2 2893.7,2952.76 2893.7,2834.65 3011.81,2716.54 3070.87,2716.54 v1(3090.55,2736.22) ; v1(2952.76,2342.52) 2933.07,2322.83 2933.07,2125.98 2972.44,2086.61 3090.55,2086.61 3129.92,2047.24 v1(3188.98,2047.24)
NetP17_2: SONR2.2 U4.11 | length 4132.4
  Top Layer w15: U4.11 3196.85,2173.23 3248.03,2224.41 3307.09,2224.41 3700.79,2618.11 v1(3700.79,2716.54) ; v2(4094.49,2952.76) 4271.65,3129.92 4271.65,3188.98 v2(4192.91,3267.72) ; v2(5305.12,4301.18) 5364.17,4301.18 5454.33,4391.34 SONR2.2
  Bottom Layer w15: v1(3700.79,2716.54) 3720.47,2736.22 3897.64,2736.22 4094.49,2933.07 v2(4094.49,2952.76) ; v2(4192.91,3267.72) 4251.97,3326.77 4350.39,3326.77 4389.76,3366.14 4389.76,3661.42 4488.19,3759.84 4763.78,3759.84 4921.26,3917.32 4921.26,4370.08 5019.69,4468.5 5137.8,4468.5 v2(5305.12,4301.18) ; SONR2.2@5531.5,4389.76 SONR2.2
NetP17_3: SONR2.3 U4.12 | length 4240.3
  Top Layer w15: U4.12 3165.35,2200.79 3228.35,2263.78 3307.09,2263.78 3661.42,2618.11 v1(3661.42,2755.91)
  Bottom Layer w15: v1(3661.42,2755.91) 3681.1,2775.59 3858.27,2775.59 4015.75,2933.07 4015.75,3043.41 4024.56,3052.22 4024.56,3089.52 4015.75,3098.32 4015.75,3110.24 4114.17,3208.66 4409.45,3208.66 4468.5,3267.72 4468.5,3602.36 4527.56,3661.42 5393.7,3661.42 5610.24,3877.95 5610.24,4412.6 SONR2.3
NetP18_2: SONR1.2 U4.13 | length 2352.6
  Top Layer w15: v1(3129.92,2224.41) 3133.86,2220.47 U4.13 ; v1(3681.1,1633.86) 3897.64,1850.39 v1(3897.64,2165.35)
  Bottom Layer w15: v1(3129.92,2224.41) 3129.92,2244.09 3169.29,2283.46 3307.09,2283.46 3484.25,2106.3 3602.36,2106.3 3661.42,2165.35 v1(3897.64,2165.35) ; v1(3681.1,1633.86) 3700.79,1614.17 3700.79,1437.01 3720.47,1417.32 3720.47,1299.21 3759.84,1259.84 3759.84,1181.1 3818.9,1122.05 3876.38,1122.05 SONR1.2
NetP18_3: SONR1.3 U4.14 | length 2412.2
  Top Layer w15: U4.14 3102.36,2255.91 v1(3110.24,2263.78) ; v1(3582.68,1633.86) 3681.1,1732.28 3740.16,1732.28 3858.27,1850.39 v1(3858.27,2224.41)
  Bottom Layer w15: v1(3110.24,2263.78) 3169.29,2322.83 3326.77,2322.83 3425.2,2224.41 v1(3858.27,2224.41) ; v1(3582.68,1633.86) 3582.68,1535.43 3661.42,1456.69 3661.42,1197.64 3717.32,1141.73 3756.69,1141.73 SONR1.3
NetP19_2: BUZZ.2 U4.9 | length 3440.3
  Top Layer w15: U4.9 3740.16,2614.17 v1(3740.16,2685.04) ; v2(4153.54,2913.39) 4232.28,2913.39 4370.08,3051.18 4370.08,3188.98 4291.34,3267.72 v2(4291.34,3257.87)
  Bottom Layer w15: v1(3740.16,2685.04) 3944.88,2685.04 4153.54,2893.7 v2(4153.54,2913.39) ; v2(4291.34,3257.87) 4379.92,3257.87 4429.13,3307.09 4429.13,3641.73 4507.87,3720.47 4803.15,3720.47 5018.11,3935.43 BUZZ.2
NetP20_2: BATT.2 MAIN_SW.2 | length 538.8
  Top Layer w60: MAIN_SW.2 3561.42,5610.24 3897.64,5610.24 3897.64,5648.03 BATT.2
NetP21_1: BUCK_IN.2 MAIN_SW.1 MT_SW.2 | length 1057.2
  Top Layer w60: MAIN_SW.1 3699.21,5807.09 MT_SW.2 3700.79,5846.46 3723.52,5869.19 4348.92,5869.19 4409.45,5808.66 BUCK_IN.2
NetQ2_2: Q2.2 R11.2 | length 486.6
  Top Layer w15: R11.2 3526.88,1588.67 3691.66,1588.67 3697.48,1594.49 3900.16,1594.49 3938.27,1556.38 Q2.2
NetR1_2: R1.2 U2.1 U2.5 | length 1052
  Top Layer w60: U2.1 3606.69,4413.78 3661.42,4468.5 3956.69,4468.5 4006.69,4418.5 U2.5
  Bottom Layer w60: R1.2 3287.4,4586.61 3496.46,4377.56 U2.1
NetR2_2: R2.2 U3.1 U3.5 | length 1904.9
  Top Layer w60: U3.1 4050.79,3291.73 3956.69,3385.83 3956.69,3641.73 4006.69,3691.73 U3.5
  Bottom Layer w50: U3.5 4096.06,3700.79 4291.34,3700.79 4330.71,3740.16 4330.71,3838.58 4665.35,4173.23 4665.35,4212.6 4724.41,4271.65 4724.41,4318.5 R2.2
NetR9_1: R9.1 R10.1 | length 236.4
  Top Layer w15: R9.1 5668.01,1930.41 5668.01,1964.28 5691.54,1987.81 R10.1
NetR11_1: R11.1 U4.19 | length 700.6
  Top Layer w15: U4.19 3062.99,2015.75 v1(3070.87,2007.87) ; v1(3366.14,1732.28) 3366.14,1675.79 R11.1
  Bottom Layer w15: v1(3070.87,2007.87) 3129.92,1948.82 3129.92,1850.39 3208.66,1771.65 3326.77,1771.65 v1(3366.14,1732.28)
NetU1_9: U1.9 U2.2 U3.2 | length 3348.7
  Top Layer w15: v1(4311.02,3484.25) 4330.71,3484.25 4370.08,3444.88 4389.76,3444.88 4448.82,3385.83 4448.82,3346.46 4803.15,3346.46 5078.74,3070.87 5078.74,2263.78 4972.44,2157.48 U1.9
  Bottom Layer w15: U2.2 3706.69,4364.17 3779.53,4291.34 3779.53,4192.91 3897.64,4074.8 3897.64,3581.1 U3.2 4139.76,3391.73 4232.28,3484.25 v1(4311.02,3484.25)
NetU1_10: U1.10 U2.3 U3.3 | length 3213.5
  Top Layer w15: v1(4350.39,3385.83) 4429.13,3307.09 4783.46,3307.09 5039.37,3051.18 5039.37,2269.09 4940.95,2170.67 U1.10
  Bottom Layer w15: U2.3 3853.54,4330.71 3853.54,4237.01 3877.95,4212.6 3917.32,4212.6 3937.01,4192.91 3937.01,4133.86 3937.01,3641.73 U3.3 4118.9,3523.62 4330.71,3523.62 4350.39,3503.94 v1(4350.39,3385.83)
NetU1_13: U1.13 U2.6 U3.6 | length 3366.3
  Top Layer w15: U3.6 4082.28,3791.73 4015.75,3858.27 4015.75,3917.32 4035.43,3937.01 4114.17,3937.01 4271.65,3779.53 4271.65,3405.51 4409.45,3267.72 4783.46,3267.72 5000,3051.18 5000,2381.89 4846.46,2228.35 U1.13
  Bottom Layer w15: U3.6 4173.23,3877.95 4173.23,4311.02 U2.6
NetU1_14: U1.14 U2.7 U3.7 | length 3157.8
  Top Layer w15: U3.7 4100.39,3891.73 4232.28,3759.84 4232.28,3385.83 4389.76,3228.35 4763.78,3228.35 4960.63,3031.5 4960.63,2381.89 4814.96,2236.22 U1.14
  Bottom Layer w15: U3.7 4133.86,3938.58 4133.86,4251.97 4055.12,4330.71 4055.12,4409.45 4074.8,4429.13 4155.12,4429.13 U2.7
pads on no net: U1.12 U1.18 U1.20 U4.18 U4.20 U4.22

## Polygon pours and split planes (outlines as drawn)
no net on Top Layer "Top Overlay-No Net" (solid, pour order 6): 2244.09,5905.51 2244.09,2755.91 2047.24,2755.91 2047.24,1200.79 2598.43,1082.68 3009.79,994.53 3129.92,984.25 3543.31,944.88 3956.69,944.88 4370.08,944.88 4783.46,984.25 5157.48,1062.99 5688.98,1181.1 5728.35,1200.79 5767.72,1220.47 5826.77,1220.47 5826.77,1318.9 5826.77,2755.91 5629.92,2755.91 5629.92,5905.51
no net on Bottom Layer "Top Overlay-No Net" (solid, pour order 8): 2244.09,5905.51 2244.09,2755.91 2047.24,2755.91 2047.24,1200.79 3090.55,984.25 3169.29,964.57 4625.98,964.57 4880.5,1010.19 5393.7,1102.36 5472.44,1141.73 5826.77,1220.47 5826.77,2755.91 5629.92,2755.91 5629.92,5905.51

## Silkscreen, mask and mechanical layers (free items; w line width, h text height)
Top Overlay:
  drawing of 2763 lines, arcs and shapes, not listed
  text "-" at 3877.95,5846.46 h60
  text "+  +" at 4192.91,5826.77 h60
  text "-  -" at 4192.91,5551.18 h60
  text "+" at 3877.95,5531.5 h60
  text "SDA SCL G V" at 3444.88,4842.52 h40
  text "V G TX RX" at 4035.43,4842.52 h40
  text "5V T E G" at 2440.94,4547.24 h30 r270
  text "MX1919" at 3681.1,4507.87 h60
  text "5V T E G" at 5472.44,4311.02 h30 r90
  text "Chandula N. Design" at 3838.58,4212.6 h35
  text "MX1919" at 3986.69,3474.25 h60 r90
  text "SDA SCL G V" at 3700.79,3129.92 h40
  text "5V G A B" at 2519.68,2854.33 h35
  text "B A G 5V" at 5196.85,2854.33 h35
  text "RST" at 4901.57,2834.65 h40
  text "RST" at 3385.83,2814.96 h40
  text "5V" at 4586.61,2598.43 h40
  text "5V" at 3051.18,2559.06 h40
  text "SDA SCL G V" at 2716.54,2224.41 h40 r90
  text "Chandula N.Design in SL" at 3661.42,1771.65 h35
  text "V G TX RX RST" at 4842.52,1358.27 h40
  text "V G TX RX RST" at 2696.85,1338.58 h40
  text "G" at 3484.25,1318.9 h35
  text "5V" at 4389.76,1318.9 h35
  text "G E T 5V" at 3759.84,944.88 h30
Bottom Overlay:
  drawing of 5364 lines, arcs and shapes, not listed
  text "MICROBoT::V1" at 4645.67,2303.15 h150
  text "ChandulaN DESIGN / In Sri Lanka" at 4251.97,1850.39 h40

## Text inside footprints (layer, text, board x,y; h text height)
"ISP PRG(1)": Top Overlay "1" at 4842.83,2557.8 h50 r90; Top Overlay "2" at 4742.83,2537.8 h50 r90; Top Overlay "5" at 4842.83,2897.8 h50 r90; Top Overlay "6" at 4742.83,2897.8 h50 r90
"ISP PRG(2)": Top Overlay "1" at 3327.09,2538.11 h50 r90; Top Overlay "2" at 3227.09,2518.11 h50 r90; Top Overlay "5" at 3327.09,2878.11 h50 r90; Top Overlay "6" at 3227.09,2878.11 h50 r90